# Altium PCB i.)PCB1.PcbDoc
Units mm, origin at the board's own origin, x right, y up, seen from the top; angles counter-clockwise.
Board outline 57.02 x 35.13 mm, 2 copper layers (Top Layer, Bottom Layer); 15 components, 15 nets, 49 pads, 0 vias.
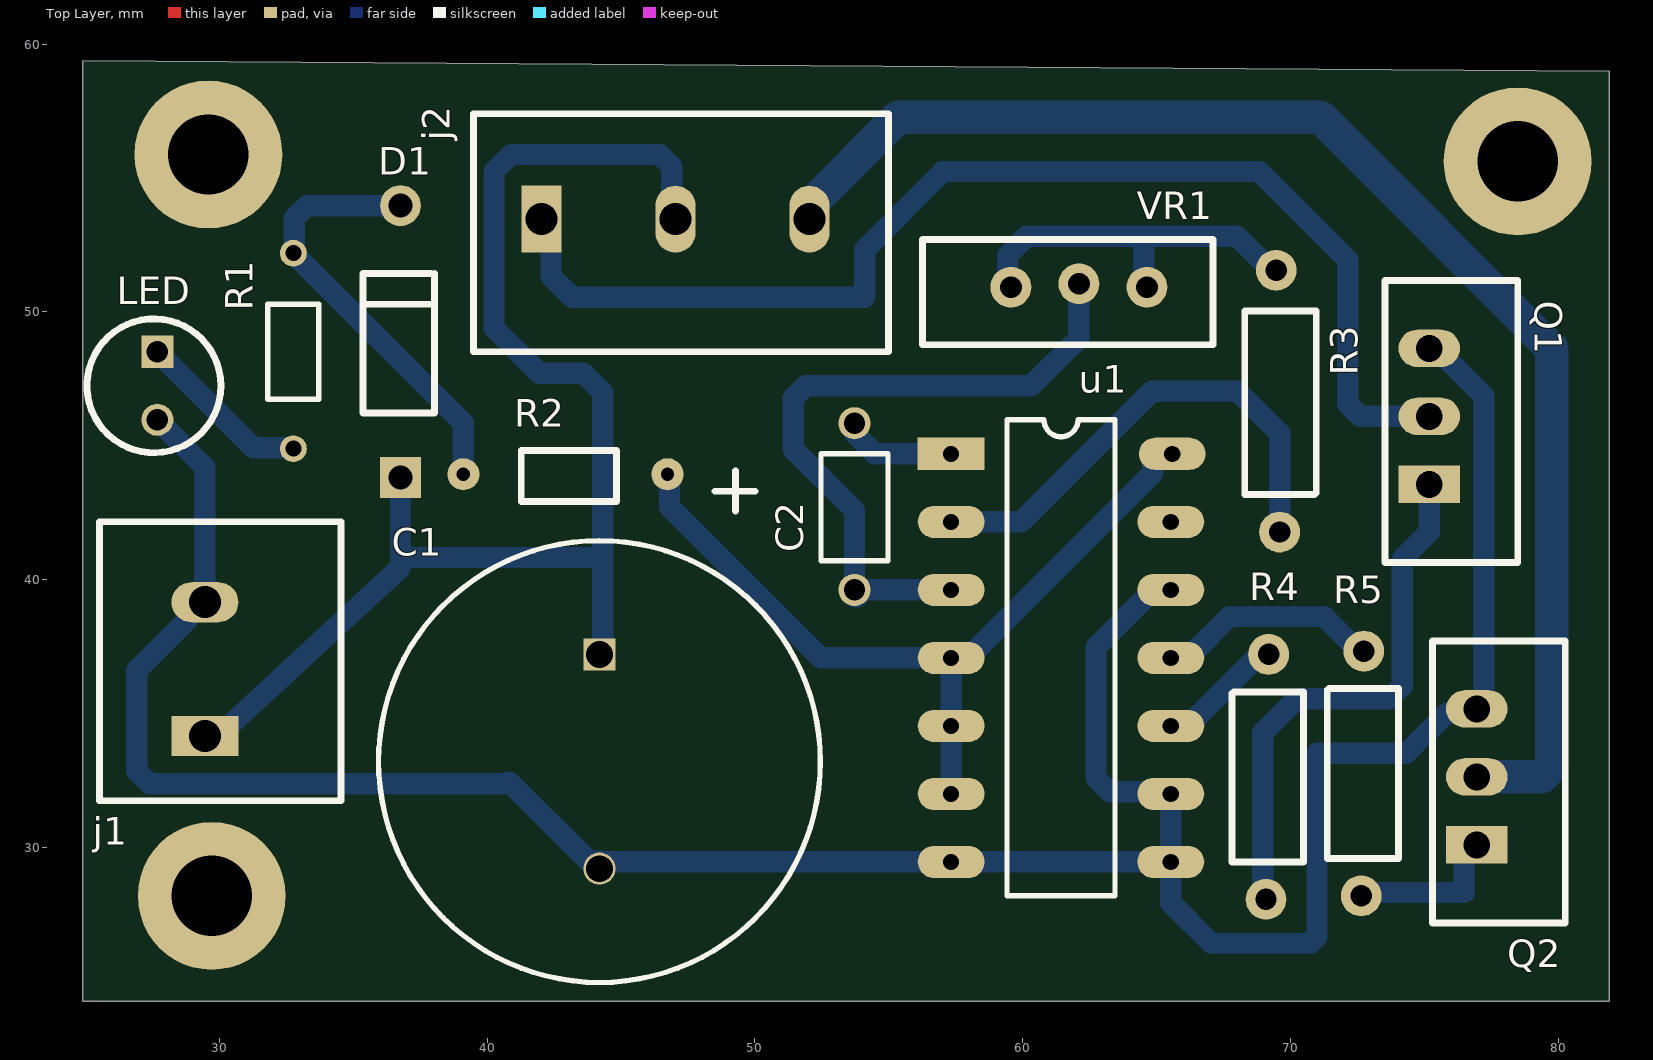
[diagram p0: Top Layer view]
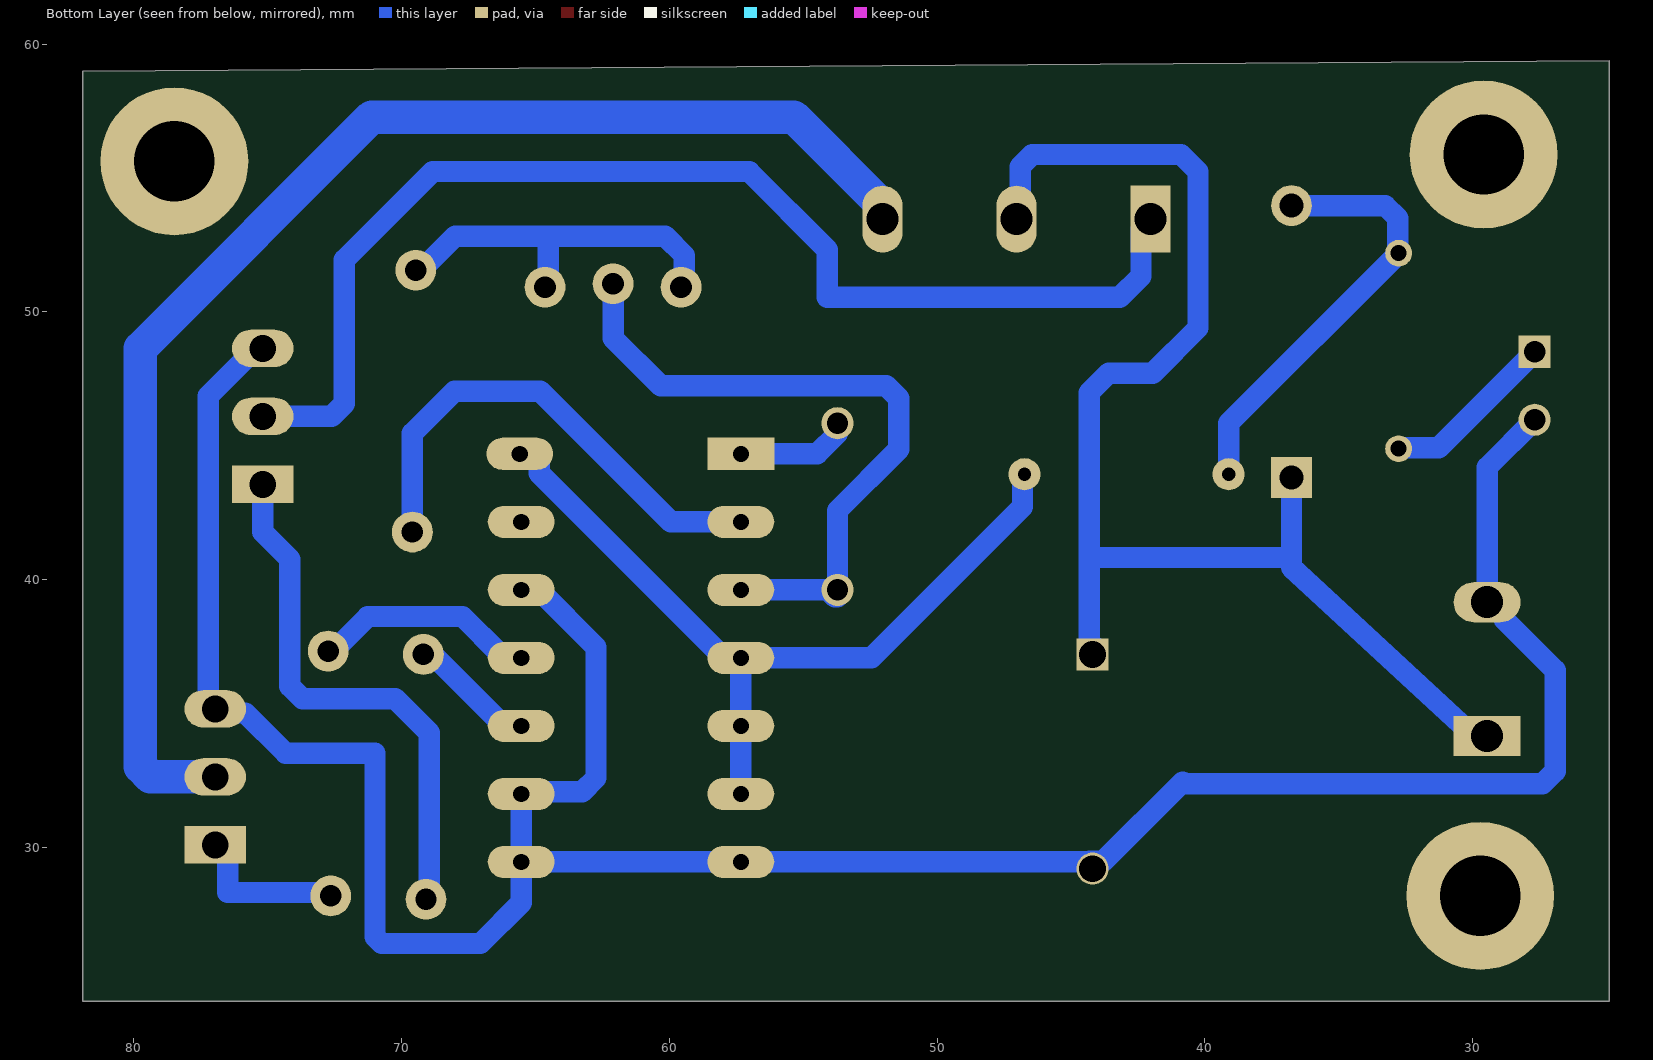
[diagram p1: Bottom Layer view, seen from below]
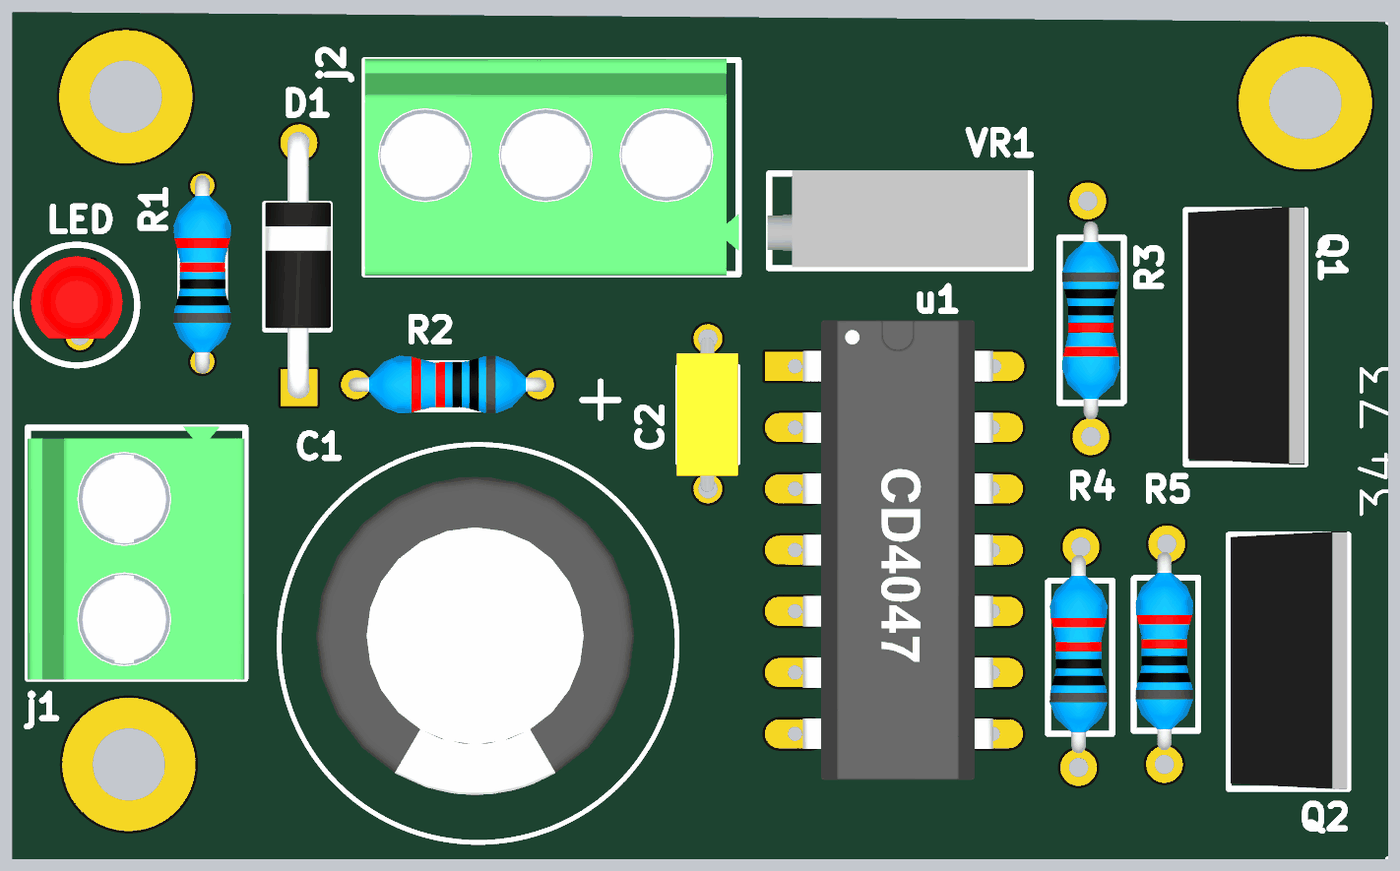
[diagram p2: 3D render of the assembled board from above, using the file's embedded part models]

## Layer stack, top to bottom
Top Solder: solder mask 0.0102, Solder Resist, Dk 3.5
Top Layer: signal copper 0.0356
Dielectric 1: dielectric 0.32, FR-4, Dk 4.8
Bottom Layer: signal copper 0.0356
Bottom Solder: solder mask 0.0102, Solder Resist, Dk 3.5

## Board outline
24.892,24.257 81.915,24.257 81.915,58.983 24.892,59.391

## Design rules (kind name [scope] priority, off if disabled: settings)
Clearance [All] p1: gap=0.254 ignorepadtopadclearanceinfootprint=FALSE except(0: Arc-Hole Track-Hole SMDPad-Hole THPad-Hole Via-Hole Fill-Hole Poly-Hole Region-Hole Text-Hole)
Height [All] p1: minheight=0 maxheight=30 prefheight=20
HoleSize [All] p1: absolutevalues=TRUE maxlimit=5 minlimit=0.025 maxpercent=80.000 minpercent=20.000
PolygonConnect [All] p1: connectstyle=Relief reliefconductorwidth=0.254 reliefentries=4 polygonreliefangle="90 Angle" airgapwidth=0.254
RoutingVias [All] p1: holewidth=0.711 width=1.27 viastyle="Through Hole" minholewidth=0.711 minwidth=1.27 maxholewidth=0.711 maxwidth=1.27
SolderMaskExpansion [All] p1: expansion=0.102
Width [All] p1: maxlimit=3 minlimit=0.8 preferedwidth=1
28 further rules are at their usual default settings.

## Components (designator, comment, footprint, x,y, rotation, side; value= is the part's Value field where it differs from the comment)
C1 "2200uF" 2200uF_35V_Ely_TH 44.196,37.211 r270 top
C2 "0.01uF" "0.01uF_cer_th_C - duplicate1" 53.721,44.704 r90 top
D1 "D1" 1N4007_TH_D 36.703,46.228 r270 top (schematic designator 1)
j1 "2P_5mm_TH" 2pin_5mm_TH 29.337,37.592 r180 top
j2 "3pin_5mm_TH" 3pin_5mm_TH 42.037,53.467 r90 top
LED "LED_3mm_red_TH" LED_RED_TH 27.686,48.514 r270 top (schematic designator indicator)
Q1 "IRF540ZLPBF" IRF540_TH_MOS 73.279,45.847 r180 top
Q2 "IRF540ZLPBF" IRF540_TH_MOS 75.057,32.385 r180 top
R1 "1k" 1k_0.25_th_R 32.766,50.292 r90 top
R2 "R_330_0.25W_TH" 330ohm_th_R 41.275,44.069 r180 top
R3 "390k" 390ohm_0.25w_th_R 69.596,43.18 r270 top
R4 "220" 220ohm_0.25_th_R 69.185,35.814 r90 top
R5 "220" 220ohm_0.25_th_R 72.741,35.941 r90 top
u1 "CD4047BE IC" CD4047_TH_IC 57.332,44.704 r0 top
VR1 "VR_1K_trim_20T" 1k_var_th_R 62.357,50.673 r0 top

## Footprints (in the part's own frame and the unit in brackets; to place one, negate y for a bottom-side part, rotate by r counter-clockwise, add the part's x,y. Pads: shape width x height; smd on the part's side, far side on the other; paste and mask are expansions set on the pad)
"0.01uF_cer_th_C - duplicate1" [mm]
  round 1.2 hole 0.8: 1(-5.08,0) 2(1.143,0)
  silkscreen extent -4,-1.25 0,1.25, body extent -5.2,-1.25 1.2,1.3, height 9.58
1k_0.25_th_R [mm]
  round 1 hole 0.6: 1(1.905,0) 2(-5.397,0)
  silkscreen extent -3.56,-0.95 0,0.95, body extent -5.89,-1.2 2.33,1.2, height 3.2
1k_var_th_R [mil]
  round 60 hole 31.89: 1(90,10) 2(-10,15) 3(-110,10)
  silkscreen extent -240,-75 187,80, body extent -242,-73 182,85, height 429
1N4007_TH_D [mil]
  rect 60x60 hole 35.43: 1(95,2.5)
  round 60 hole 35.43: 2(-305,2.5)
  silkscreen extent -205,-53 0,52, body extent -322,-53 112,55, height 146
2pin_5mm_TH [mm]
  rect 2.5x1.5 hole 1.2: 1(-0.127,3.429)
  oval 2.5x1.5 hole 1.2: 2(-0.127,-1.571)
  silkscreen extent -5.21,-4.57 3.81,5.84, body extent -5.19,-4.61 3.81,5.88, height 13.5
3pin_5mm_TH [mm]
  rect 2.5x1.5 hole 1.2: 1(0,0)
  oval 2.5x1.5 hole 1.2: 2(0,-5) 3(0,-10)
  silkscreen extent -4.95,-12.95 3.94,2.54, body extent -5.01,-12.96 3.99,2.54, height 13.5
220ohm_0.25_th_R [mil]
  round 60 hole 31.5: 1(55,0) 2(-305,3.82)
  silkscreen extent -250,-51 0,54, body extent -282,-44 42,51, height 126
330ohm_th_R [mm]
  round 1.2 hole 0.5: 1(-5.461,0.127) 2(2.159,0.127)
  silkscreen extent -3.56,-0.76 0,1.14, body extent -5.76,-1.08 2.46,1.33, height 3.2
390ohm_0.25w_th_R [mil]
  round 60 hole 31.5: 1(-330,-5) 2(55,0)
  silkscreen extent -270,-51 0,54, body extent -297,-47 27,47, height 126
2200uF_35V_Ely_TH [mm]
  rect 1.2x1.2 hole 1: 1(0,0)
  round 1.2 hole 1: 2(8,0)
  silkscreen extent -6.86,-8.25 12.25,8.25, body extent -2.92,-6.72 10.28,6.48, height 26.4
CD4047_TH_IC [mm]
  rect 2.5x1.2 hole 0.6: 1(0,0)
  oval 2.5x1.2 hole 0.6: 2(0,-2.54) 3(0,-5.08) 4(0,-7.62) 5(0,-10.16) 6(0,-12.7) 7(0,-15.24) 8(8.2,-15.24) 9(8.2,-12.7) 10(8.2,-10.16) 11(8.2,-7.62) 12(8.2,-5.08) 13(8.2,-2.54) 14(8.255,0)
  silkscreen extent 2.08,-16.51 6.11,1.27, body extent 0.33,-17.14 8.2,1.91, height 4.15
IRF540_TH_MOS [mm]
  rect 2.3x1.4 hole 1: 1(-1.905,2.286)
  oval 2.3x1.4 hole 1: 2(-1.905,-0.254) 3(-1.905,-2.794)
  silkscreen extent -5.21,-5.33 -0.25,5.21, body extent -5.17,-5.46 -0.34,5.21, height 23.26
LED_RED_TH [mm]
  rect 1.2x1.2 hole 0.8: 1(0,0)
  round 1.2 hole 0.8: 2(2.54,0)
  silkscreen extent -1.23,-2.62 3.77,2.37, body extent -0.76,-2.03 2.67,1.77, height 6.14

## Part data
C1: library part C_2200uF_Ely_35V_TH, "Aluminum Electrolytic Capacitor, Polarized, Aluminum (wet), 35V, 20% +Tol, 20% -Tol, 2200uF, Through Hole Mount", Capacitance=2.2mF, Case/Package=Radial, Dielectric Material=Aluminium, ESR (Equivalent Series Resistance)=121mR, Manufacturer 1="CDE Illinois Capacitor", Manufacturer Part Number 1=228CKR035M, Max Operating Temperature=85°C, Min Operating Temperature=-40°C, Package Quantity=50, Ripple Current=2.09A, Tolerance=20%, Voltage Rating=35V, Category="Aluminum Electrolytic Capacitors", ComponentLink1Description=https://datasheet.ciiva.com/16819/ckr-cks-16819885.pdf?src-supplier=Future+Electronics, ComponentLink1URL=https://datasheet.ciiva.com/16819/ckr-cks-16819885.pdf?src-supplier=Future+Electronics, Diameter=16mm, Height=31.5mm, Height - Seated (Max)=1.24inch, Lead Free="Lead Free", Lead Pitch=0.295inch, Life (Hours)=2000Hour, Mount="Through Hole", Packaging=Bulk, Polarity=Polar, Pricing 1="1=1.52000, 10=1.20100, 50=1.04060, 100=0.90040, 500=0.68034, 1000=0.60030, 2500=0.56028, 5000=0.54027 (USD)", REACH SVHC="No SVHC", RoHS=Yes, Stock 1=3987, Supplier 1=Digi-Key, Voltage Rating (DC)=35V
C2: library part C_0.01uF_Cer_50V_TH, "Capacitor Ceramic 0.01uF 50V C0G 5% 5mm T/R", Capacitance=10nF, Case/Package=Radial, Manufacturer 1=TDK, Manufacturer Part Number 1=FA28NP01H103JNU06, Max Operating Temperature=150°C, Min Operating Temperature=-55°C, Ratings=AEC-Q200, Tolerance=5%, Voltage Rating=50V, Category="Ceramic Capacitors", ComponentLink1Description=https://product.tdk.com/info/en/catalog/datasheets/leadmlcc_halogenfree_fa150_en.pdf?src-supplier=Digi-Key, ComponentLink1URL=https://product.tdk.com/info/en/catalog/datasheets/leadmlcc_halogenfree_fa150_en.pdf?src-supplier=Digi-Key, Features="High Temperature", Height - Seated (Max)=0.217inch, Lead/Base Style=Kinked, Lead Pitch=0.197inch, Length=0.157inch, Mount="Through Hole", Packaging="Tape and Reel", Pricing 1="1=0.48000, 10=0.33700, 50=0.25500, 100=0.22220, 500=0.16456, 1000=0.13988 (USD)", RoHS=Yes, RoHS Compliant=Yes, Stock 1=2762, Supplier 1=Digi-Key, Width=0.098inch
D1: library part D_1N400_th, "Diode Switching 1KV 1A 2-Pin DO-41 T/R", Average Rectified Current=1A, Capacitance=8pF, Case/Package=DO-41, Forward Voltage=1V, Manufacturer 1=Diodes, Manufacturer Part Number 1=1N4007G-T, Max Operating Temperature=175°C, Max Repetitive Reverse Voltage (Vrrm)=1kV, Max Reverse Current=5uA, Max Surge Current=30A, Min Operating Temperature=-65°C, Package Quantity=5000, Category="Rectifier Diodes", ComponentLink1Description=https://datasheet.ciiva.com/36525/1537942-36525995.pdf?src-supplier=Jameco, ComponentLink1URL=https://datasheet.ciiva.com/36525/1537942-36525995.pdf?src-supplier=Jameco, ComponentLink2Description=https://datasheet.ciiva.com/15219/getdatasheetpartid-213960-15219547.pdf?src-supplier=Verical, ComponentLink2URL=https://datasheet.ciiva.com/15219/getdatasheetpartid-213960-15219547.pdf?src-supplier=Verical, ComponentLink3Description=https://datasheet.ciiva.com/25947/ds29002-25947029.pdf?src-supplier=Avnet+Europe, ComponentLink3URL=https://datasheet.ciiva.com/25947/ds29002-25947029.pdf?src-supplier=Avnet+Europe, ComponentLink4Description=https://datasheet.ciiva.com/912/ds29002-912230.pdf?src-supplier=Digi-Key, ComponentLink4URL=https://datasheet.ciiva.com/912/ds29002-912230.pdf?src-supplier=Digi-Key, ComponentLink5Description=https://datasheet.ciiva.com/16395/ds29002-16395514.pdf?src-supplier=Future+Electronics, ComponentLink5URL=https://datasheet.ciiva.com/16395/ds29002-16395514.pdf?src-supplier=Future+Electronics, Current Rating=1A, Element Configuration=Single, Forward Current=1A, Height=2.71mm, Lead Free="Lead Free", Length=4.7mm, Max Reverse Voltage (DC)=1kV, Mount="Through Hole", Number of Pins=2, Output Current=1A, Packaging="Tape and Reel", Peak Non-Repetitive Surge Current=30A, Polarity=Standard, Pricing 1="1=0.30000, 10=0.24800, 100=0.13170, 500=0.08662, 1000=0.05890, 2000=0.05313 (USD)", Radiation Hardening=No, Recovery Time=2us, Reverse Recovery Time=2us, Reverse Voltage (DC)=1kV, RoHS=Yes, RoHS Compliant=Yes, Series=-, Stock 1=97269, Supplier 1=Digi-Key, Voltage Rating (DC)=1kV, Weight=0.010582oz, Width=2.71mm
j1: "TERM BLOCK PLUG 2POS 90DEG 5MM", Color=Black, Current=15A, Manufacturer 1="On-Shore Technology", Manufacturer Part Number 1=OSTTH020100, Max Operating Temperature=115°C, Min Operating Temperature=-40°C, Voltage=300V, Category="Terminal Blocks", ComponentLink1Description=http://www.on-shore.com/wp-content/uploads/2015/09/ostthxx0160.pdf?src-supplier=Digi-Key, ComponentLink1URL=http://www.on-shore.com/wp-content/uploads/2015/09/ostthxx0160.pdf?src-supplier=Digi-Key, Contact Plating=Nickel, Mount="Free Hanging", Number of Levels=1, Number of Pins=2, Number of Positions=2, Number of Positions Per Level=2, Packaging=Bulk, Pitch=0.197inch, Pricing 1="1=0.86000, 10=0.53400, 25=0.45680, 50=0.41080, 100=0.40220, 250=0.34232, 500=0.32518, 1000=0.29096, 5000=0.22820 (USD)", RoHS=Yes, RoHS Compliant=No, Series=OSTTH, Stock 1=527, Supplier 1=Digi-Key, Termination=Screw, Wire Gauge (Max)=22AWG, Wire Gauge (Min)=14AWG
j2: "Connector Terminal Blocks Female 3 Position 5mm Screw Straig", Color=Blue, Current=15A, Flammability Rating="UL94 V-0", Manufacturer 1="On-Shore Technology", Manufacturer Part Number 1=OSTTH030160, Max Operating Temperature=105°C, Min Operating Temperature=-30°C, Package Quantity=1, Voltage=300V, Category="Terminal Blocks", ComponentLink1Description=https://datasheet.ciiva.com/794/ostthxx0160-794896.pdf?src-supplier=Digi-Key, ComponentLink1URL=https://datasheet.ciiva.com/794/ostthxx0160-794896.pdf?src-supplier=Digi-Key, ComponentLink2Description=https://datasheet.ciiva.com/19475/164806-19475818.pdf?src-supplier=Jameco, ComponentLink2URL=https://datasheet.ciiva.com/19475/164806-19475818.pdf?src-supplier=Jameco, Contact Material=Brass,Steel, Depth=13.6mm, Height=11mm, Housing Color=Blue, Housing Material=Thermoplastic, Lead Free="Lead Free", Length=15.7mm, Max Current Rating=15A, Mount="Free Hanging,Cable", Number of Contacts=3, Number of Levels=1, Number of Positions=3, Number of Positions Per Level=3, Number of Rows=1, Orientation=Straight, Packaging=Bulk, Pitch=0.197inch, Pricing 1="1=1.09000, 10=0.76300, 25=0.71120, 50=0.64540, 100=0.64260, 250=0.54264, 500=0.51408, 1000=0.45696, 5000=0.38080 (USD)", RoHS=Yes, RoHS Compliant=Yes, Series=OSTTH, Stock 1=37899, Supplier 1=Digi-Key, Termination=Screw, Width=13.6mm, Wire Gauge (Max)=22AWG, Wire Gauge (Min)=14AWG
LED: Manufacturer 1=SunLED, Manufacturer Part Number 1=XLMDK34D, Category=LEDs, Pricing 1="1=0.38000, 10=0.30000, 100=0.13470, 500=0.12168, 1000=0.09996, 2000=0.08692, 5000=0.07823, 10000=0.06954, 25000=0.06519 (USD)", RoHS=No, Stock 1=8826, Supplier 1=Digi-Key
Q1 Q2: "Mosfet, Power; N-ch; Vdss 100V; Rds(on) 21MILLIOHMS; Id 36A; TO-262; Pd 92W; Vgs +/-20", Case/Package=TO-262, Continuous Drain Current (ID)=36A, Drain to Source Breakdown Voltage=100V, Drain to Source Resistance=26.5mR, Gate to Source Voltage (Vgs)=20V, Input Capacitance=1.77nF, Manufacturer 1=Infineon, Max Operating Temperature=175°C, Max Power Dissipation=92W, Min Operating Temperature=-55°C, Category=MOSFETs, ComponentLink1Description=https://www.alliedelec.com/m/d/23899d70707f5ac9a5c306f9e15d4494.pdf?src-supplier=Allied+Electronics, ComponentLink1URL=https://www.alliedelec.com/m/d/23899d70707f5ac9a5c306f9e15d4494.pdf?src-supplier=Allied+Electronics, ComponentLink2Description=http://www.infineon.com/dgdl/irf540zpbf.pdf?fileId=5546d462533600a4015355e3af7d19a6&src-supplier=Digi-Key, ComponentLink2URL=http://www.infineon.com/dgdl/irf540zpbf.pdf?fileId=5546d462533600a4015355e3af7d19a6&src-supplier=Digi-Key, Drain to Source Voltage (Vdss)=100V, Halogen Free="Halogen Free", Height=0.38inch, Lead Free="Contains Lead", Length=0.42inch, Manufacturer Part Number 1=IRF540ZLPBF, Max Dual Supply Voltage=100V, Mount="Through Hole", Number of Pins=3, Packaging=Rail/Tube, Power Dissipation=92W, Pricing 1="1=1.59000, 10=1.42500, 100=1.11120, 500=0.91792, 1000=0.80520 (USD)", Rds On Max=26.5mR, RoHS=Yes, RoHS Compliant=Yes, Stock 1=947, Supplier 1=Digi-Key, Turn-Off Delay Time=43ns, Turn-On Delay Time=15ns, Width=0.19inch
R1: library part R_1K_0.25W_TH, "TE Connectivity CFR16 Series Axial Carbon Film Resistor 1k 5% 0.25W -1200  0ppm/C", Case/Package=Axial, Manufacturer 1="TE Connectivity", Manufacturer Part Number 1=CFR16J1K0, Max Operating Temperature=155°C, Max Power Dissipation=250mW, Min Operating Temperature=-55°C, Number of Resistors=1, Resistance=1kR, Resistance Tolerance=5%, Resistor Type="Thin Film", Temperature Coefficient=0ppm/°C, Voltage Rating=200V, Category="Through-Hole Resistors", ComponentLink1Description=https://datasheet.ciiva.com/11823/0900766b80098b49-11823166.pdf?src-supplier=RSComponents, ComponentLink1URL=https://datasheet.ciiva.com/11823/0900766b80098b49-11823166.pdf?src-supplier=RSComponents, ComponentLink2Description=https://datasheet.ciiva.com/24428/eng-ds-1773195-d-24428424.pdf?src-supplier=Onlinecomponents.com, ComponentLink2URL=https://datasheet.ciiva.com/24428/eng-ds-1773195-d-24428424.pdf?src-supplier=Onlinecomponents.com, ComponentLink3Description=https://datasheet.ciiva.com/22664/1723854-22664943.pdf?src-supplier=Element14, ComponentLink3URL=https://datasheet.ciiva.com/22664/1723854-22664943.pdf?src-supplier=Element14, Diameter=1.85mm, ELV=Compliant, Length=3.5mm, Mount=Axial, Number of Terminations=2, Packaging="Cut Tape", Power Rating=250mW, Pricing 1="1=0.10000, 10=0.07900, 25=0.05440, 50=0.04240, 100=0.03020, 250=0.02360, 500=0.01876, 1000=0.01331 (USD)", Radiation Hardening=No, REACH SVHC="No SVHC", RoHS=Yes, RoHS Compliant=Yes, Series="CFR16, Neohm", Stock 1=4940, Supplier 1=Digi-Key, Technology="CARBON FILM", Termination=Axial, Tolerance=5%, Voltage Rating (DC)=200V
R2: "TE Connectivity CFR16 Series Axial Carbon Film Resistor 330 5% 0.25W -1200  0ppm/C", Case/Package=Conformal, Manufacturer 1="TE Connectivity", Manufacturer Part Number 1=CFR16J330RJIT, Max Operating Temperature=155°C, Min Operating Temperature=-55°C, Power Rating=250mW, Resistance=330R, Temperature Coefficient=0ppm/°C, Tolerance=5%, ComponentLink1Description=https://datasheet.ciiva.com/11823/0900766b80098b49-11823361.pdf?src-supplier=RSComponents, ComponentLink1URL=https://datasheet.ciiva.com/11823/0900766b80098b49-11823361.pdf?src-supplier=RSComponents, Diameter=1.85mm, Length=3.5mm, RoHS=Yes, Stock 1=1, Supplier 1=RSComponents, Termination=Axial
R3: library part R_390K_0.25W_TH, "RES 390K OHM 1/4W 5% AXIAL", Case/Package=Axial, Manufacturer 1=Yageo, Manufacturer Part Number 1=CFR-25JB-52-390K, Max Operating Temperature=155°C, Max Power Dissipation=250mW, Min Operating Temperature=-55°C, Package Quantity=200, Resistance=390kR, Resistor Type="Carbon Film", Temperature Coefficient=-700ppm/°C, Tolerance=5%, Category="Through-Hole Resistors", ComponentLink1Description=https://datasheet.ciiva.com/2713/yageolr-cfr-2013-2713170.pdf?src-supplier=Digi-Key, ComponentLink1URL=https://datasheet.ciiva.com/2713/yageolr-cfr-2013-2713170.pdf?src-supplier=Digi-Key, Lead Free="Lead Free", Length=0.248inch, Number of Terminations=2, Packaging=Bulk, Pricing 1="1=0.10000, 10=0.06700, 25=0.04640, 50=0.03600, 100=0.02580, 250=0.02008, 500=0.01596, 1000=0.01133, 5000=0.00876 (USD)", RoHS=Yes, RoHS Compliant=Yes, Series=CFR, Stock 1=11679, Supplier 1=Digi-Key
R4 R5: library part R_220_0.25W_TH, "RES 220 OHM 1/4W 5% AXIAL", Case/Package=Conformal, Manufacturer 1="Stackpole Electronics", Manufacturer Part Number 1=CF14JT220R, Max Operating Temperature=155°C, Max Power Dissipation=250mW, Min Operating Temperature=-55°C, Package Quantity=1, Resistance=220R, Resistor Type="Carbon Film", Temperature Coefficient=-400ppm/°C, Tolerance=5%, Category="Through-Hole Resistors", ComponentLink1Description=https://www.seielect.com/catalog/SEI-Packaging.pdf?src-supplier=Digi-Key, ComponentLink1URL=https://www.seielect.com/catalog/SEI-Packaging.pdf?src-supplier=Digi-Key, ComponentLink2Description=https://www.seielect.com/catalog/SEI-CF_CFM.pdf?src-supplier=Avnet, ComponentLink2URL=https://www.seielect.com/catalog/SEI-CF_CFM.pdf?src-supplier=Avnet, ComponentLink3Description=https://www.verical.com/server-webapp/html/getDatasheet?partID=375100&src-supplier=Verical, ComponentLink3URL=https://www.verical.com/server-webapp/html/getDatasheet?partID=375100&src-supplier=Verical, ComponentLink4Description=http://components.arrow.com/part/dataview/44988614S316465N1174?src-supplier=Arrow+Electronics, ComponentLink4URL=http://components.arrow.com/part/dataview/44988614S316465N1174?src-supplier=Arrow+Electronics, Construction=Cylindrical, Contact Plating=Tin,Matte, Diameter=2.3mm, Features="Flame Retardant Coating", Lead Free="Lead Free", Length=6.5mm, Military Standard=Not, Mount="Through Hole,Axial", Number of Terminations=2, Packaging="Tape and Reel", Power Rating=250mW, Pricing 1="1=0.10000, 10=0.03600, 25=0.02640, 50=0.02000, 100=0.01480, 250=0.01124, 500=0.00900, 1000=0.00662 (USD)", Radiation Hardening=No, RoHS=Yes, RoHS Compliant=Yes, Series=CF, Stock 1=142794, Supplier 1=Digi-Key, Termination=Axial
u1: "MONO/ASTABLE MULTIVIBRATOR, 125NS, DIP-14; Multivibrator Type:Monostable / Astable; Output Current:6.8A; Supply Voltage Min:3V; Supply Voltage Max:18V; Logic Case Style:DIP; No. of Pins:14; Propagation Delay:125ns; Packaging:Each ;RoHS Compliant: Yes", Case/Package=DIP, High Level Output Current=-4.2mA, Input Capacitance=5pF, Low Level Output Current=4.2mA, Manufacturer 1="Texas Instruments", Manufacturer Part Number 1=CD4047BE, Max Operating Temperature=125°C, Max Power Dissipation=500mW, Max Supply Current=20uA, Max Supply Voltage=18V, Min Operating Temperature=-55°C, Min Supply Voltage=3V, Operating Supply Voltage=12V, Output Current=6.8mA, Package Quantity=25, Category="Logic ICs", ComponentLink1Description=https://datasheet.ciiva.com/14134/cd4047b-eng-tds-14134622.pdf?src-supplier=Distrelec, ComponentLink1URL=https://datasheet.ciiva.com/14134/cd4047b-eng-tds-14134622.pdf?src-supplier=Distrelec, ComponentLink2Description=https://datasheet.ciiva.com/27050/894331-27050683.pdf?src-supplier=Jameco, ComponentLink2URL=https://datasheet.ciiva.com/27050/894331-27050683.pdf?src-supplier=Jameco, ComponentLink3Description=https://datasheet.ciiva.com/15095/getdatasheetpartid-72002-15095147.pdf?src-supplier=Verical, ComponentLink3URL=https://datasheet.ciiva.com/15095/getdatasheetpartid-72002-15095147.pdf?src-supplier=Verical, ComponentLink4Description=https://datasheet.ciiva.com/41455/001015487-da-01-en-ic-mono-astbl-multi-cd4047be-pdip-14-tid-41455405.pdf?src-supplier=Conrad, ComponentLink4URL=https://datasheet.ciiva.com/41455/001015487-da-01-en-ic-mono-astbl-multi-cd4047be-pdip-14-tid-41455405.pdf?src-supplier=Conrad, ComponentLink5Description=https://datasheet.ciiva.com/29297/173223-da-01-en-c-mos-ic-cd-4047-be-dip14-tid-29297339.pdf?src-supplier=Conrad, ComponentLink5URL=https://datasheet.ciiva.com/29297/173223-da-01-en-c-mos-ic-cd-4047-be-dip14-tid-29297339.pdf?src-supplier=Conrad, ComponentLink6Description=https://datasheet.ciiva.com/1509/1830980-1509169.pdf?src-supplier=Element14, ComponentLink6URL=https://datasheet.ciiva.com/1509/1830980-1509169.pdf?src-supplier=Element14, ComponentLink7Description=https://datasheet.ciiva.com/1885/cd4047b-1885142.pdf?src-supplier=Digi-Key, ComponentLink7URL=https://datasheet.ciiva.com/1885/cd4047b-1885142.pdf?src-supplier=Digi-Key, ComponentLink8Description=https://datasheet.ciiva.com/3305/cd4047b-3305349.pdf?src-supplier=Avnet, ComponentLink8URL=https://datasheet.ciiva.com/3305/cd4047b-3305349.pdf?src-supplier=Avnet, ComponentLink9Description=https://datasheet.ciiva.com/26242/cd4047b-26242053.pdf?src-supplier=Avnet+Europe, ComponentLink9URL=https://datasheet.ciiva.com/26242/cd4047b-26242053.pdf?src-supplier=Avnet+Europe, Contact Plating=Gold, Height=4.57mm, Independent Circuits=1, Lead Free="Lead Free", Length=19.3mm, Logic Function=Multivibrator, Mount="Through Hole", Number of Bits=1, Number of Circuits=1, Number of Elements=1, Number of Pins=14, Packaging=Rail/Tube, Power Dissipation=500mW, Pricing 1="1=0.74000, 10=0.64700, 25=0.60800, 100=0.49610, 250=0.46084, 500=0.39220, 1000=0.32375 (USD)", Propagation Delay=125ns, Quiescent Current=20uA, Radiation Hardening=No, REACH SVHC="No SVHC", RoHS=Yes, Schmitt Trigger Input=No, Stock 1=117, Supplier 1=Digi-Key, Turn-On Delay Time=300ns, Weight=0.032734oz, Width=6.35mm
VR1: "TRIMMER 1K OHM 1W PC PIN", Manufacturer 1=Bourns, Manufacturer Part Number 1=3290H-1-102M, Max Operating Temperature=150°C, Max Power Dissipation=1W, Min Operating Temperature=-65°C, Package Quantity=50, Resistance=1kR, Resistor Type=Wirewound, Temperature Coefficient=50ppm/°C, Tolerance=5%, Category="Variable Resistors and Potentiometers", ComponentLink1Description=https://datasheet.ciiva.com/2165/3290-2165858.pdf?src-supplier=Digi-Key, ComponentLink1URL=https://datasheet.ciiva.com/2165/3290-2165858.pdf?src-supplier=Digi-Key, ComponentLink2Description=https://datasheet.ciiva.com/16813/3290-16813453.pdf?src-supplier=Avnet+Europe, ComponentLink2URL=https://datasheet.ciiva.com/16813/3290-16813453.pdf?src-supplier=Avnet+Europe, Contact Plating=Gold, Depth=6.1mm, Height=0.375inch, Length=17.78mm, Military Standard=Not, Mount="PCB,Through Hole,Panel", Number of Turns=25, Packaging=Rail/Tube, Power Rating=1W, Pricing 1="50=38.65400 (USD)", RoHS=Yes, RoHS Compliant=Yes, Series="Trimpot® 3290 - Sealed", Supplier 1=Digi-Key, Taper=Linear, Termination=Pin, Weight=0.025oz

## Free pads (board coordinates)
  round 5.524 hole 3: ""(29.591,55.88) ""(29.718,28.194) ""(78.486,55.626)

## Nets (pads, with @x,y where several pads share a name; then routed paths per layer and width w, separated by ;. In a path a pad name is that pad's centre, name@x,y a point inside that pad or via, vN(x,y) a via of type N, cw(c..) or ccw(c..) an arc to the next point about the centre after c; other vN are vias at no path point)
+12: C1.1 D1.1 j1.1 j2.2 | length 51.2
  Bottom Layer w0.8: j1.1@29.114,33.813 j1.1 29.964,34.163 36.767,40.458 ; D1.1@36.767,43.307 36.767,40.458 ; C1.1@44.069,37.465 44.069,37.211 44.323,37.465 44.323,40.894 ; j2.2 46.903,53.601 46.903,55.426 46.449,55.88 40.894,55.88 40.259,55.245 40.259,49.403 41.948,47.714 43.599,47.714 44.323,46.99 44.323,40.894 ; 36.767,40.458 36.767,40.831 44.259,40.831 44.323,40.894
"+12 driver": D1.2 R1.1 R2.2 | length 16.4
  Bottom Layer w0.8: D1.2 33.273,53.975 32.804,53.506 32.804,52.235 R1.1 39.116,45.847 R2.2
GND: C1.2 j1.2 LED.2 Q1.3 Q2.3 u1.7 u1.8 u1.9 u1.12 | length 105.2
  Bottom Layer w0.8: LED.2 29.464,44.196 j1.2 29.153,39.163 28.83,38.84 28.83,38.529 26.924,36.623 26.924,32.854 27.393,32.385 40.767,32.385 40.831,32.448 43.792,29.487 44.301,29.487 44.324,29.465 57.332,29.465 u1.8 ; u1.12 64.882,39.624 62.738,37.48 62.738,32.6 63.257,32.081 65.455,32.081 u1.9 u1.8 ; Q1.3 75.311,48.768 77.216,46.863 77.216,35.433 Q2.3 76.809,35.026 75.832,35.026 74.334,33.528 70.993,33.528 70.993,26.67 70.739,26.416 67.056,26.416 65.532,27.94 u1.8
NetC2_1: C2.1 u1.3 VR1.2 | length 25.7
  Bottom Layer w0.8: u1.3 54.083,39.624 53.829,39.37 53.721,39.37 C2.1 53.721,42.585 51.435,44.871 51.435,46.775 51.904,47.244 60.325,47.244 62.103,49.022 VR1.2
NetC2_2: C2.2 u1.1 | length 4.1
  Bottom Layer w0.8: C2.2@53.721,45.593 53.721,45.466 54.483,44.704 u1.1
Netindicator_1: LED.1 R1.2 | length 6.6
  Bottom Layer w0.8: LED.1 31.267,44.933 32.728,44.933 R1.2
Netj2_1: j2.1 Q1.2 | length 45.3
  Bottom Layer w0.8: j2.1 42.387,53.117 42.387,51.339 43.18,50.546 54.102,50.546 54.102,52.324 57.023,55.245 68.834,55.245 72.136,51.943 72.136,46.57 72.605,46.101 Q1.2
Netj2_3: j2.3 Q2.2 | length 51.7
  Bottom Layer w1.254: j2.3 52.037,53.967 55.347,57.277 71.12,57.277 79.756,48.641 79.756,33.02 79.375,32.639 Q2.2
NetQ1_1: Q1.1 R4.2 | length 20.3
  Bottom Layer w0.8: R4.2 68.961,28.194 68.961,34.29 70.231,35.56 73.699,35.56 74.168,36.029 74.168,40.767 75.184,41.783 Q1.1 Q1.1@75.311,43.434
NetQ2_1: Q2.1 R5.2 | length 5.9
  Bottom Layer w0.8: R5.2 72.771,28.321 76.493,28.321 76.493,29.699 76.893,30.099 Q2.1
NetR2_1: R2.1 u1.4 u1.5 u1.6 u1.14 | length 30.9
  Bottom Layer w0.8: R2.1 46.813,43.865 46.813,42.722 52.451,37.084 u1.4 ; u1.6 u1.5 u1.4 ; u1.14 65.045,44.704 64.86,44.519 64.86,43.977 57.967,37.084 u1.4
NetR3_1: R3.1 VR1.1 VR1.3 | length 14.1
  Bottom Layer w0.8: VR1.3 59.436,51.054 59.436,52.109 60.159,52.832 64.516,52.832 ; VR1.1 64.516,51.054 64.516,52.832 ; R3.1 69.273,51.562 68.003,52.832 64.516,52.832
NetR3_2: R3.2 u1.2 | length 18.6
  Bottom Layer w0.8: u1.2 59.944,42.164 64.82,47.04 68.022,47.04 69.596,45.466 R3.2
"Q output": R4.1 u1.10 | length 4.8
  Bottom Layer w0.8: u1.10 66.182,34.544 68.71,37.072 69.046,37.072 R4.1
"Q\ output": R5.1 u1.11 | length 8.4
  Bottom Layer w0.8: u1.11 65.728,37.084 65.913,37.269 65.967,37.215 66.313,37.215 67.725,38.627 71.256,38.627 72.545,37.338 R5.1
pads on no net: u1.13
copper on no net: | length 0.6
  Bottom Layer w0.8: 65.532,42.164 66.182,42.164

## Dimensions
81.915,58.983 to 81.915,24.257 on Top Overlay
24.892,59.69 to 81.915,58.983 on Top Overlay